# EAGLE board stim_rafael (EAGLE 7.1.0)
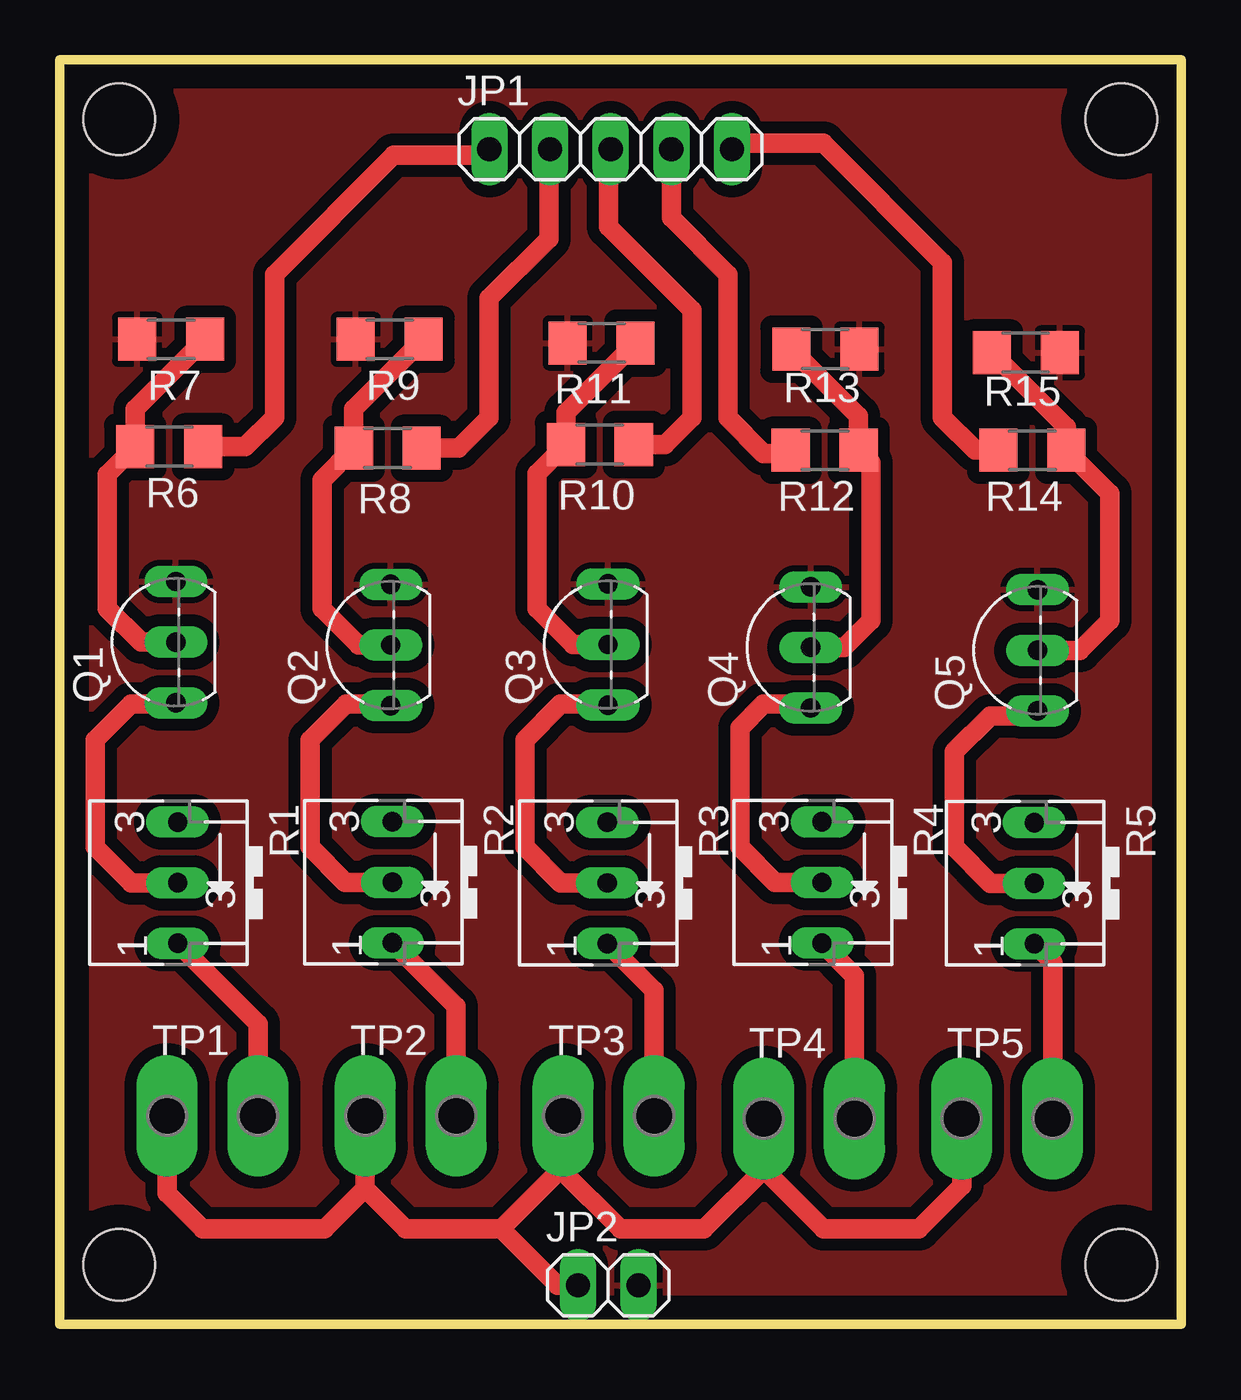
[diagram p0: board, top side]

Size 47 x 53 mm. Coordinates in mm from the lower left corner, seen from the top.
Outline: 0,0 47,0 47,53 0,53 0,0
Copper layers (1*16): Top 0.035mm / dielectric 1.5mm / Bottom 0.035mm
Design rules "default": minimum track width 10mil, minimum drill 24mil, track to track 8mil, track to pad 8mil, pad to pad 8mil, via to via 8mil, smd to smd 8mil, copper to edge 40mil, drill to drill 8mil, minimum pad ring 10mil, minimum via ring 8mil, stop-mask expansion 4mil, vias tented up to drill 0mil, thermal gap 10mil
Holes 3 mm at 44.5,50.5 2.5,50.5 2.5,2.5 44.5,2.5

## Footprints (pad centres in the part's own frame; a part is rotated, then mirrored left to right if it is on the bottom)
1X05 = drill 1.016 long: 1 -5.08,0; 2 -2.54,0; 3 0,0; 4 2.54,0; 5 5.08,0
1X02 = drill 1.016 long: 1 -1.27,0; 2 1.27,0
TO92-EBC = drill 0.813 long: B 0,-1.27; C -2.54,-1.27; E 2.54,-1.27
B25V = drill 0.813 long: A 2.54,0.635; E -2.54,0.635; S 0,0.635
R1206 = smd 1.6 x 1.803: 1 -1.422,0; 2 1.422,0
P2-38-17 = drill 1.702 pad 2.121 long: TP-1 -1.905,0; TP-2 1.905,0

## Placement (x,y rotation side)
JP1  [1X05]  23.09,49.25 0 top
JP2  [1X02]  22.99,1.64 0 top
Q1  BC548  [TO92-EBC]  3.6,28.59 90 top
Q2  BC548  [TO92-EBC]  12.6,28.47 90 top
Q3  BC548  [TO92-EBC]  21.71,28.49 90 top
Q4  BC548  [TO92-EBC]  30.21,28.37 90 top
Q5  BC548  [TO92-EBC]  39.71,28.25 90 top
R1  [B25V]  4.31,18.51 270 top
R2  [B25V]  13.31,18.53 270 top
R3  [B25V]  22.31,18.5 270 top
R4  [B25V]  31.31,18.52 270 top
R5  [B25V]  40.21,18.49 270 top
R6  [R1206]  4.59,36.78 180 top
R7  [R1206]  4.67,41.28 180 top
R8  [R1206]  13.75,36.72 0 top
R9  [R1206]  13.83,41.28 180 top
R10  [R1206]  22.64,36.87 0 top
R11  [R1206]  22.71,41.13 180 top
R12  [R1206]  32.06,36.63 180 top
R13  [R1206]  32.09,40.87 0 top
R14  [R1206]  40.76,36.63 180 top
R15  [R1206]  40.49,40.72 0 top
TP1  TP2P2-38-17  [P2-38-17]  6.41,8.74 0 top
TP2  TP2P2-38-17  [P2-38-17]  14.71,8.74 0 top
TP3  TP2P2-38-17  [P2-38-17]  23.01,8.74 0 top
TP4  TP2P2-38-17  [P2-38-17]  31.41,8.63 0 top
TP5  TP2P2-38-17  [P2-38-17]  39.71,8.63 0 top

## Library data of the parts
JP1 JP2 = pinhead
Q1-Q5 = transistor-npn
R1-R5 = pot
R6-R15 = eagle-ltspice; SPICEMODEL: NONE; SPICEPREFIX: R
TP1-TP5 = testpad

## Nets
GND: JP2.2 Q1.E Q2.E Q3.E Q4.E Q5.E R7.2 R9.2 R11.2 R13.2 R15.2
IO1: JP1.1 R6.1
IO2: JP1.2 R8.2
IO3: JP1.3 R10.2
IO4: JP1.4 R12.2
IO5: JP1.5 R14.2
N$1: R2.A TP2.TP-2
N$2: R3.A TP3.TP-2
N$3: Q3.C R3.S
N$4: Q1.C R1.S
N$5: Q5.B R14.1 R15.1
N$6: R1.A TP1.TP-2
N$7: R4.A TP4.TP-2
N$8: Q4.C R4.S
N$9: R5.A TP5.TP-2
N$10: Q5.C R5.S
N$11: Q4.B R12.1 R13.1
N$12: Q3.B R10.1 R11.1
N$13: Q2.B R8.1 R9.1
N$15: Q1.B R6.2 R7.1
SDA: Q2.C R2.S
VDD: JP2.1 TP1.TP-1 TP2.TP-1 TP3.TP-1 TP4.TP-1 TP5.TP-1

## Tracks (layer width: path | path; a pad name or v marks a point on that pad's centre or on a via)
GND
  pour Top (isolate 0.5): 0,0 47,0 47,53 0,53
IO1
  Top 0.813: R6.1 7.78,36.78 9,38 9,44 14,49 17.76,49 JP1.1
IO2
  Top 0.813: R8.2 16.72,36.72 18,38 18,43 20.5,45.5 20.5,49.2 JP1.2
IO3
  Top 0.813: R10.2 25.37,36.87 26.5,38 26.5,42.5 23,46 23,49.16 JP1.3
IO4
  Top 0.813: JP1.4 25.63,46.37 28,44 28,38 29.5,36.5 30.51,36.5 R12.2
IO5
  Top 0.813: R14.2 38.37,36.63 37,38 37,44.5 32,49.5 28.42,49.5 JP1.5
N$1
  Top 0.813: TP2.TP-2 16.61,13.32 R2.A
N$2
  Top 0.813: TP3.TP-2 24.91,13.99 R3.A
N$3
  Top 0.813: R3.S 21,18.5 19.5,20 19.5,24.5 21,26 22.93,26 Q3.C
N$4
  Top 0.813: R1.S 2.99,18.51 1.5,20 1.5,24.5 3,26 4.82,26 Q1.C
N$5
  Top 0.813: Q5.B 42.75,28.25 44,29.5 44,34.81 R14.1 42.18,37.61 R15.1
N$6
  Top 0.813: TP1.TP-2 8.31,12.6 R1.A
N$7
  Top 0.813: TP4.TP-2 33.31,14.61 R4.A
N$8
  Top 0.813: R4.S 29.98,18.52 28.5,20 28.5,25 29.5,26 31.31,26 Q4.C
N$9
  Top 0.813: TP5.TP-2 41.62,15.18 R5.A
N$10
  Top 0.813: R5.S 39.01,18.49 37.5,20 37.5,24 39,25.5 40.77,25.5 Q5.C
N$11
  Top 0.813: Q4.B 32.87,28.37 34,29.5 34,36.11 R12.1 33.48,38.06 R13.1
N$12
  Top 0.813: Q3.B 21.51,28.49 20,30 20,35.65 R10.1 21.22,38.22 R11.1
N$13
  Top 0.813: Q2.B 12.53,28.47 11,30 11,35.39 R8.1 12.33,38.36 R9.1
N$15
  Top 0.813: Q1.B 3.41,28.59 2,30 2,35.61 R6.2 3.17,38.36 R7.1
SDA
  Top 0.813: R2.S 11.97,18.53 10.5,20 10.5,24.5 12,26 13.8,26 Q2.C
VDD
  Top 0.813: TP2.TP-1 12.8,5.7 | 12.8,5.7 14.5,4 18.5,4 | 18.5,4 21,6.5 | 21,6.5 21,8.63 TP3.TP-1 | TP1.TP-1 4.5,5.5 6,4 11.11,4 12.8,5.7 | TP4.TP-1 29.5,6.5 | 29.5,6.5 27,4 23.5,4 21,6.5 | TP5.TP-1 37.8,5.8 36,4 32.01,4 29.5,6.5 | JP2.1 20.86,1.64 18.5,4